# Altium PCB Shield_nano.PCBDOC
Units mm, origin at the board's own origin, x right, y up, seen from the top; angles counter-clockwise.
Board outline 299.72 x 199.9 mm, 2 copper layers (Top Layer, Bottom Layer); 15 components, 16 nets, 66 pads, 4 vias.
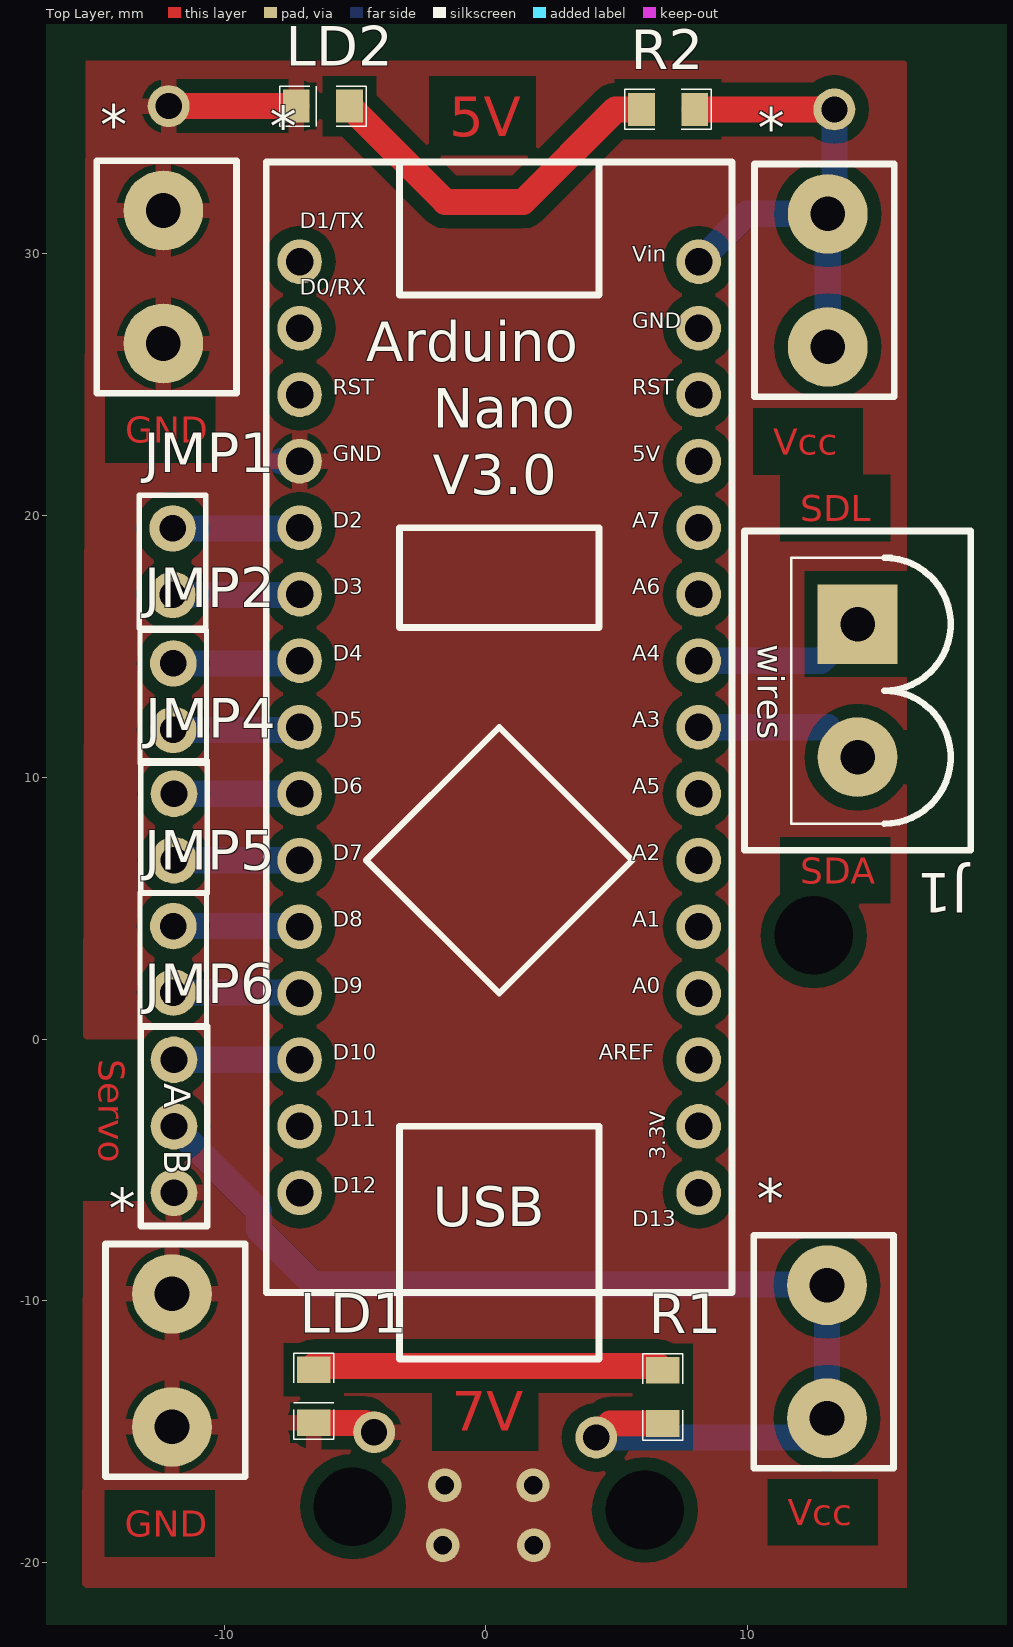
[diagram p0: Top Layer view]
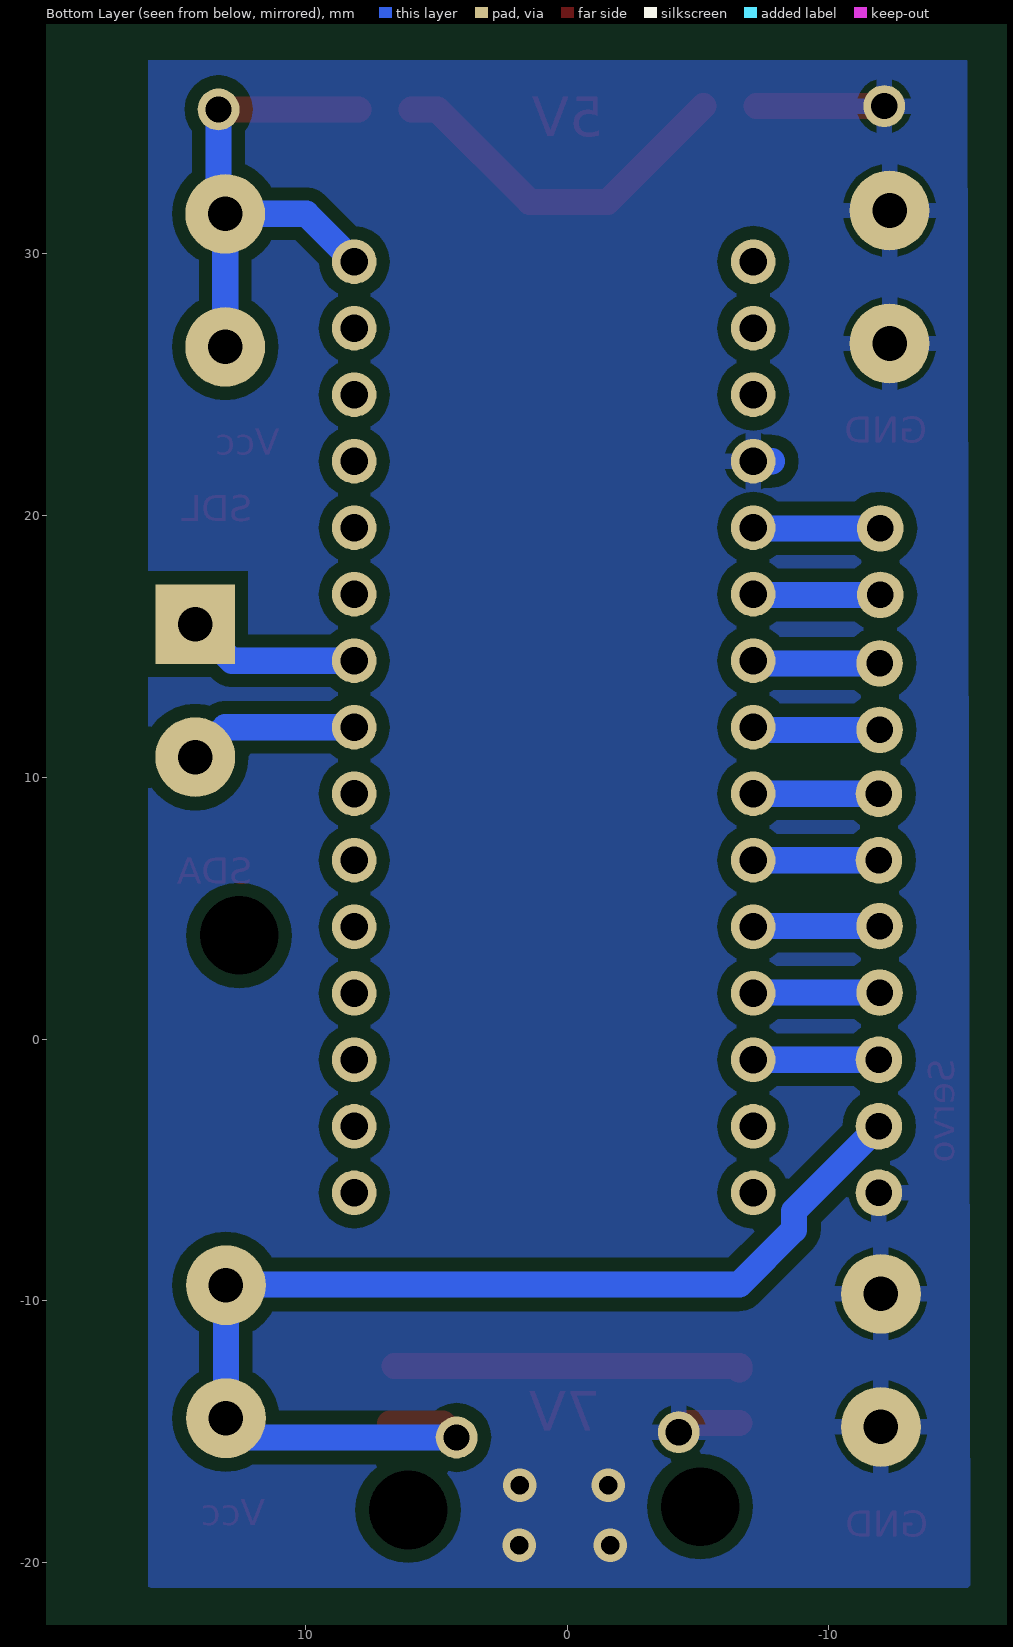
[diagram p1: Bottom Layer view, seen from below]

## Layer stack, top to bottom
Top Solder: solder mask 0.0102, Solder Resist, Dk 3.5
Top Layer: signal copper 0.0356
Dielectric1: dielectric 0.32, FR-4, Dk 4.8
Bottom Layer: signal copper 0.0356
Bottom Solder: solder mask 0.0102, Solder Resist, Dk 3.5

## Board outline
-141.655,-46.39 158.065,-46.39 158.065,153.508 -141.655,153.508

## Design rules (kind name [scope] priority, off if disabled: settings)
Clearance Clearance_bottom_polygon [OnLayer('Bottom Layer') Or OnLayer('Multi-Layer') vs OnLayer('Bottom Layer')  And  InPoly] p1: gap=0.508
Clearance Clearance_top_polygon [OnLayer('Top Layer')  Or OnLayer('Multi-Layer') vs OnLayer('Top Layer') And InPoly] p2: gap=0.508
Clearance Clearance_bottom [OnLayer('Bottom Layer') Or OnLayer('Multi-Layer') vs OnLayer('Bottom Layer')  And Not InPoly] p3: gap=0.203
Clearance Clearance_top [OnLayer('Top Layer')  Or OnLayer('Multi-Layer') vs OnLayer('Top Layer') And Not InPoly] p4: gap=0.203
Clearance Clearance_pad_to_pad [OnLayer('Multi-Layer') vs OnLayer('Multi-Layer')] p5: gap=0.254
ComponentClearance ComponentClearance_bottom [OnLayer('Bottom Overlay') vs OnLayer('Bottom Overlay')] p1: gap=0 collisioncheckmode=3 verticalgap=0.254 showdistances=FALSE
ComponentClearance ComponentClearance_top [OnLayer('Top Overlay') vs OnLayer('Top Overlay')] p2: gap=0 collisioncheckmode=3 verticalgap=0.254 showdistances=FALSE
FabricationTestPointUsage TestPointUsage [All] p1: valid=0 allowmultiple=FALSE
FabricationTestpoint Testpoint [All] p1: side=3 testpointundercomponent=TRUE minsize=1.016 maxsize=2.54 preferedsize=1.524 minholesize=0 maxholesize=1.016 preferedholesize=0.813 testpointgrid=0.025 allowsidetop=TRUE allowsidebottom=TRUE usegrid=TRUE gridtolerance=0
HoleSize [All] p1: absolutevalues=TRUE maxlimit=25.4 minlimit=0.406 maxpercent=80.000 minpercent=20.000
MinimumAnnularRing [PadXSize_AllLayers = PadYSize_AllLayers] p1: minimumring=0.254
PermittedLayers [All] p1: toplayerpermitted=TRUE bottomlayerpermitted=TRUE
PolygonConnect [All] p1: connectstyle=Relief reliefconductorwidth=0.61 reliefentries=4 polygonreliefangle="90 Angle" airgapwidth=0.254
RoutingVias [All] p1: holewidth=0.406 width=0.813 viastyle="Through Hole" minholewidth=0.4 minwidth=0.8 maxholewidth=0.6 maxwidth=10
SMDToPlane [All] p1: distance=0
SolderMaskExpansion [All] p1: expansion=0.102
ViasUnderSMD [All] p1: allowed=FALSE
Width Width_botom_top [OnLayer('Bottom Layer') or OnLayer('Top Layer')] p1: maxlimit=254 minlimit=0.254 preferedwidth=0.813 minimp=50.000000 maximp=50.000000 favimp=50.000000
26 further rules are at their usual default settings.

## Classes and differential pairs
component class Shield_nano: * J1 JMP1 JMP2 JMP4 JMP5 JMP6 LD1 LD2 R1 R2

## Components (designator, comment, footprint, x,y, rotation, side; value= is the part's Value field where it differs from the comment)
* "Connector_Cosse" Connector_Cosse -12.319,26.568 r180 top
* "Connector_Cosse" Connector_Cosse 13.056,31.521 r0 top
* "Arduino Nano" "Arduino Nano FootPrint" 0.508,14.453 r0 top
* "Connector_Cosse" Connector_Cosse 13.03,-9.398 r0 top
* "Connector_Cosse" Connector_Cosse -11.989,-14.808 r180 top
J1 "comment" AMP_2 14.199,15.85 r270 top
JMP1 "JUMPER2" JMP2-100 -11.963,16.967 r90 top
JMP2 "JUMPER2" JMP2-100 -11.938,11.811 r90 top
JMP4 "JUMPER2" JMP2-100 -11.913,6.833 r90 top
JMP5 "JUMPER2" JMP2-100 -11.938,1.778 r90 top
JMP6 "JUMPER3" JMP3-100 -11.913,-0.787 r270 top
LD1 "comment" LED0805 -6.579,-14.656 r90 top
LD2 "comment" LED0805 -7.239,35.636 r0 top
R1 "RES" 0805 6.756,-12.649 r270 top
R2 "RES" 0805 5.944,35.509 r0 top

## Footprints (in the part's own frame and the unit in brackets; to place one, negate y for a bottom-side part, rotate by r counter-clockwise, add the part's x,y. Pads: shape width x height; smd on the part's side, far side on the other; paste and mask are expansions set on the pad)
0805 [mil]
  rect 40x50 smd: 1(0,0) 2(80,0)
  silkscreen extent -25,-30 105,30
AMP_2 [mil]
  rect 120x120 hole 52: 1(0,0)
  round 120 hole 52: 2(200,0)
  silkscreen extent -140,-170 340,170
"Arduino Nano FootPrint" [mm]
  round 1.7 hole 1.04: 1(-7.62,15.24) 2(-7.62,12.7) 3(-7.62,10.16) 4(-7.62,7.62) 5(-7.62,5.08) 6(-7.62,2.54) 7(-7.62,0) 8(-7.62,-2.54) 9(-7.62,-5.08) 10(-7.62,-7.62) 11(-7.62,-10.16) 12(-7.62,-12.7) 13(-7.62,-15.24) 14(-7.62,-17.78) 15(-7.62,-20.32) 16(7.62,-20.32) 17(7.62,-17.78) 18(7.62,-15.24) 19(7.62,-12.7) 20(7.62,-10.16) 21(7.62,-7.62) 22(7.62,-5.08) 23(7.62,-2.54) 24(7.62,0) 25(7.62,2.54) 26(7.62,5.08) 27(7.62,7.62) 28(7.62,10.16) 29(7.62,12.7) 30(7.62,15.24)
  silkscreen extent -8.89,-26.67 8.89,19.05
Connector_Cosse [mil]
  round 120 hole 52.01: 1(0,0) 1(0,-200)
  silkscreen extent -110,-275 100,75
JMP2-100 [mil]
  round 70 hole 40: 1(0,0) 2(100,0)
  silkscreen extent -50,-50 150,50
JMP3-100 [mil]
  round 70 hole 40: 1(0,0) 2(200,0) 3(100,0)
  silkscreen extent -50,-50 250,50
LED0805 [mil]
  rect 40x50 smd: A(80,0) K(0,0)
  silkscreen extent -25,-30 105,30

## Part data
J1: library part POWER2, "connecteur alim 2 pôles"
JMP1 JMP2 JMP4 JMP5: "cavalier 1 position"
JMP6: "cavalier 2 positions"
LD1 LD2: library part LED, "LED 5mm/3mm/CMS"
R1 R2: "resistance"

## Free pads (board coordinates)
  round 1.524 hole 3: 3(12.522,3.962) 4(-5.08,-17.856) 5(6.071,-17.983)
  round 1.6 hole 1: 6(-12.116,35.636) 7(13.31,35.509) 8(-4.267,-15.011) 9(4.216,-15.215)

## Via types
v1: diameter 1.27, hole 0.711, Top Layer to Bottom Layer, 4 vias

## Nets (pads, with @x,y where several pads share a name; then routed paths per layer and width w, separated by ;. In a path a pad name is that pad's centre, name@x,y a point inside that pad or via, vN(x,y) a via of type N, cw(c..) or ccw(c..) an arc to the next point about the centre after c; other vN are vias at no path point)
D2: *.5 JMP1.2 | length 4.8
  Bottom Layer w1: JMP1.2 *.5@-7.137,19.507
D3: *.6 JMP1.1 | length 4.8
  Bottom Layer w1: JMP1.1 *.6@-7.137,16.967
D4: *.7 JMP2.2 | length 4.7
  Bottom Layer w1: JMP2.2 *.7@-7.214,14.351
D5: *.8 JMP2.1 | length 4.7
  Bottom Layer w1: JMP2.1 *.8@-7.214,11.811
D6: *.9 JMP4.2 | length 4.8
  Bottom Layer w1: JMP4.2 *.9
D7: *.10 JMP4.1 | length 4.8
  Bottom Layer w1: JMP4.1 *.10
D8: *.11 JMP5.2 | length 4.8
  Bottom Layer w1: JMP5.2 *.11@-7.137,4.318
D9: *.12 JMP5.1 | length 4.8
  Bottom Layer w1: JMP5.1 *.12@-7.137,1.778
D10: *.13 JMP6.1 | length 4.8
  Bottom Layer w1: JMP6.1 *.13
GND: *.1@-11.989,-9.728 *.1@-11.989,-14.808 *.1@-12.319,26.568 *.1@-12.319,31.648 *.4 JMP6.2 LD1.K LD2.K pad.6 pad.8 | length 8
  Top Layer w1: pad.6 LD2.K ; LD1.K -4.623,-14.656 pad.8
  Bottom Layer w1: *.4@-7.823,22.073 *.4
  other v1: -1.651,-19.329 1.829,-19.329 -1.575,-17.043 1.803,-17.043
NetLD1_A: LD1.A R1.1 | length 13.3
  Top Layer w1: LD1.A -6.579,-12.48 R1.1@6.587,-12.48
NetLD2_A: LD2.A R2.1 | length 14.1
  Top Layer w1: LD2.A -1.549,31.979 1.422,31.979 4.953,35.509 R2.1
SCL: *.24 J1.1 | length 6.6
  Bottom Layer w1: *.24 12.802,14.453 J1.1
SDA: *.23 J1.2 | length 6.5
  Bottom Layer w1: *.23 13.056,11.913 J1.2
VCC: *.1@13.056,26.441 *.1@13.056,31.521 *.30 pad.7 R2.2 | length 19.8
  Top Layer w1: R2.2 pad.7
  Bottom Layer w1: *.30 9.957,31.521 13.056,31.521 *.1@13.056,26.441 ; *.1@13.31,31.775 pad.7
VCC7V: *.1@13.03,-9.398 *.1@13.03,-14.478 JMP6.3 pad.9 R1.2 | length 43.8
  Top Layer w1: pad.9 4.75,-14.681 R1.2
  Bottom Layer w1: JMP6.3 -8.665,-6.575 -8.665,-7.286 -6.579,-9.373 *.1@13.03,-9.373 ; pad.9 *.1@12.294,-15.215 ; *.1@13.03,-14.478 *.1@13.03,-9.398
pads on no net: *.1@-7.112,29.693 *.2 *.3 *.14 *.15 *.16 *.17 *.18 *.19 *.20 *.21 *.22 *.25 *.26 *.27 *.28 *.29

## Polygon pours and split planes (outlines as drawn)
GND on Bottom Layer "Mechanical 1-No Net" (solid, pour order 3): -15.291,37.363 -15.265,37.389 16.002,37.389 16.002,-21.057 15.9,-20.955 -15.392,-20.955
GND on Top Layer "Mechanical 1-No Net" (solid, pour order 5): -15.291,37.363 16.002,37.363 16.078,37.287 16.078,-20.955 -15.392,-20.955 -15.418,-20.98

## Keep-outs
Keep-Out Layer:
  rectangle: -140.695,-42.73 -135.695,157.27
  rectangle: -135.695,-42.73 154.305,-37.73
  rectangle: 149.305,-37.73 154.305,157.27
  rectangle: -135.695,152.27 149.305,157.27

## Other copper
Top Layer:
  text "5V" at -1.397,34.493 h1.52
  text "GND" at -13.767,22.784 h1
  text "Vcc" at 10.973,22.327 h1
  text "SDL" at 12.014,19.787 h1
  text "SDA" at 12.014,5.944 h1
  text "Servo" at -14.783,-0.762 h1 r270
  text "7V" at -1.295,-14.961 h1.52
  text "Vcc" at 11.532,-18.567 h1
  text "GND" at -13.792,-18.999 h1

## Silkscreen, mask and mechanical layers (free items; w line width, h text height)
Top Overlay:
  text "Les bandes en violet delimitent la surface utilisable...." at -144.907,179.832 h6.35
  text "Mais vous n'etes pas obliges de tout utiliser!!" at -128.651,169.545 h6.35
Mechanical 1:
  lines w0.254: -15.367,-21.006 -15.367,37.414 16.078,37.414 16.078,-21.006 -6.604,-21.006 -15.367,-21.006

## Text inside footprints (layer, text, board x,y; h text height)
*: Top Overlay "D12" at -5.842,-5.867 h0.6; Top Overlay "D11" at -5.842,-3.327 h0.6; Top Overlay "D10" at -5.842,-0.787 h0.6; Top Overlay "D9" at -5.842,1.753 h0.6; Top Overlay "D8" at -5.842,4.293 h0.6; Top Overlay "D7" at -5.842,6.833 h0.6; Top Overlay "D6" at -5.842,9.373 h0.6; Top Overlay "D5" at -5.842,11.913 h0.6; Top Overlay "D4" at -5.842,14.453 h0.6; Top Overlay "D3" at -5.842,16.993 h0.6; Top Overlay "D2" at -5.842,19.533 h0.6; Top Overlay "GND" at -5.842,22.073 h0.6; Top Overlay "RST" at -5.842,24.613 h0.6; Top Overlay "D0/RX" at -7.112,28.423 h0.6; Top Overlay "D1/TX" at -7.112,30.963 h0.6; Top Overlay "D13" at 5.588,-7.137 h0.6; Top Overlay "3.3V" at 6.858,-4.597 h0.6 r90; Top Overlay "AREF" at 4.318,-0.787 h0.6; Top Overlay "5V" at 5.588,22.073 h0.6; Top Overlay "RST" at 5.588,24.613 h0.6; Top Overlay "GND" at 5.588,27.153 h0.6; Top Overlay "Vin" at 5.588,29.693 h0.6; Top Overlay "A0" at 5.588,1.753 h0.6; Top Overlay "A1" at 5.588,4.293 h0.6; Top Overlay "A2" at 5.588,6.833 h0.6; Top Overlay "A3" at 5.588,11.913 h0.6; Top Overlay "A4" at 5.588,14.453 h0.6; Top Overlay "A5" at 5.588,9.373 h0.6; Top Overlay "A6" at 5.588,16.993 h0.6; Top Overlay "A7" at 5.588,19.533 h0.6; Top Overlay "V3.0" at -2.032,20.803 h1.52; Top Overlay "Nano" at -2.032,23.343 h1.52; Top Overlay "Arduino" at -4.572,25.883 h1.52; Top Overlay "USB" at -2.032,-7.137 h1.52
J1: Top Overlay "wires" at 10.389,15.088 h1 r270
JMP6: Top Overlay "B" at -12.294,-4.216 h1.02 r270; Top Overlay "A" at -12.294,-1.676 h1.02 r270